# EAGLE board Proiect-TSC (EAGLE 9.7.0)
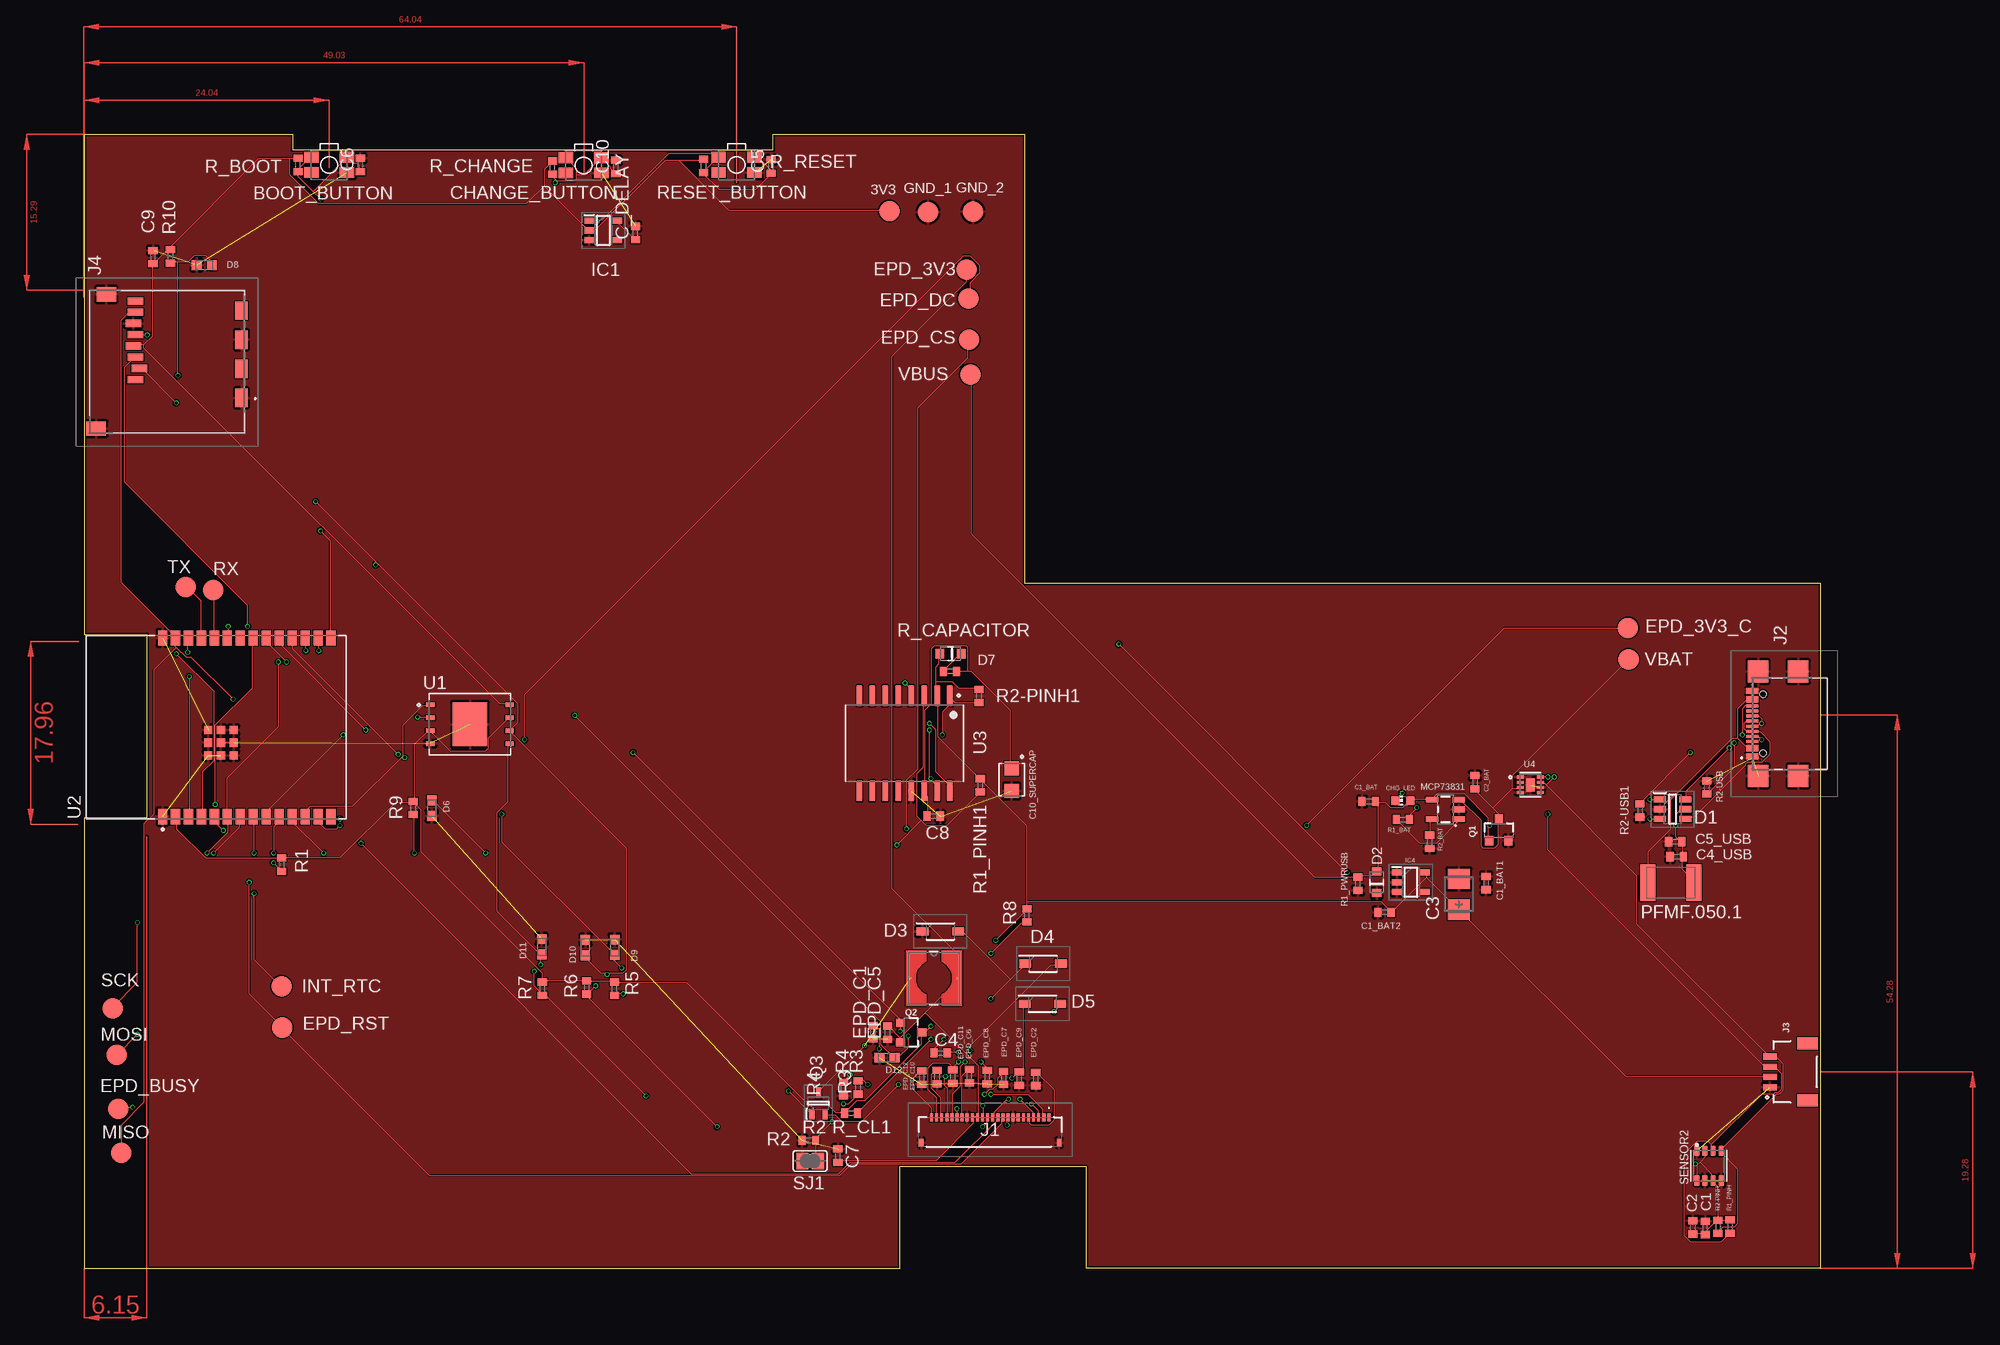
[diagram p0: board, top side]
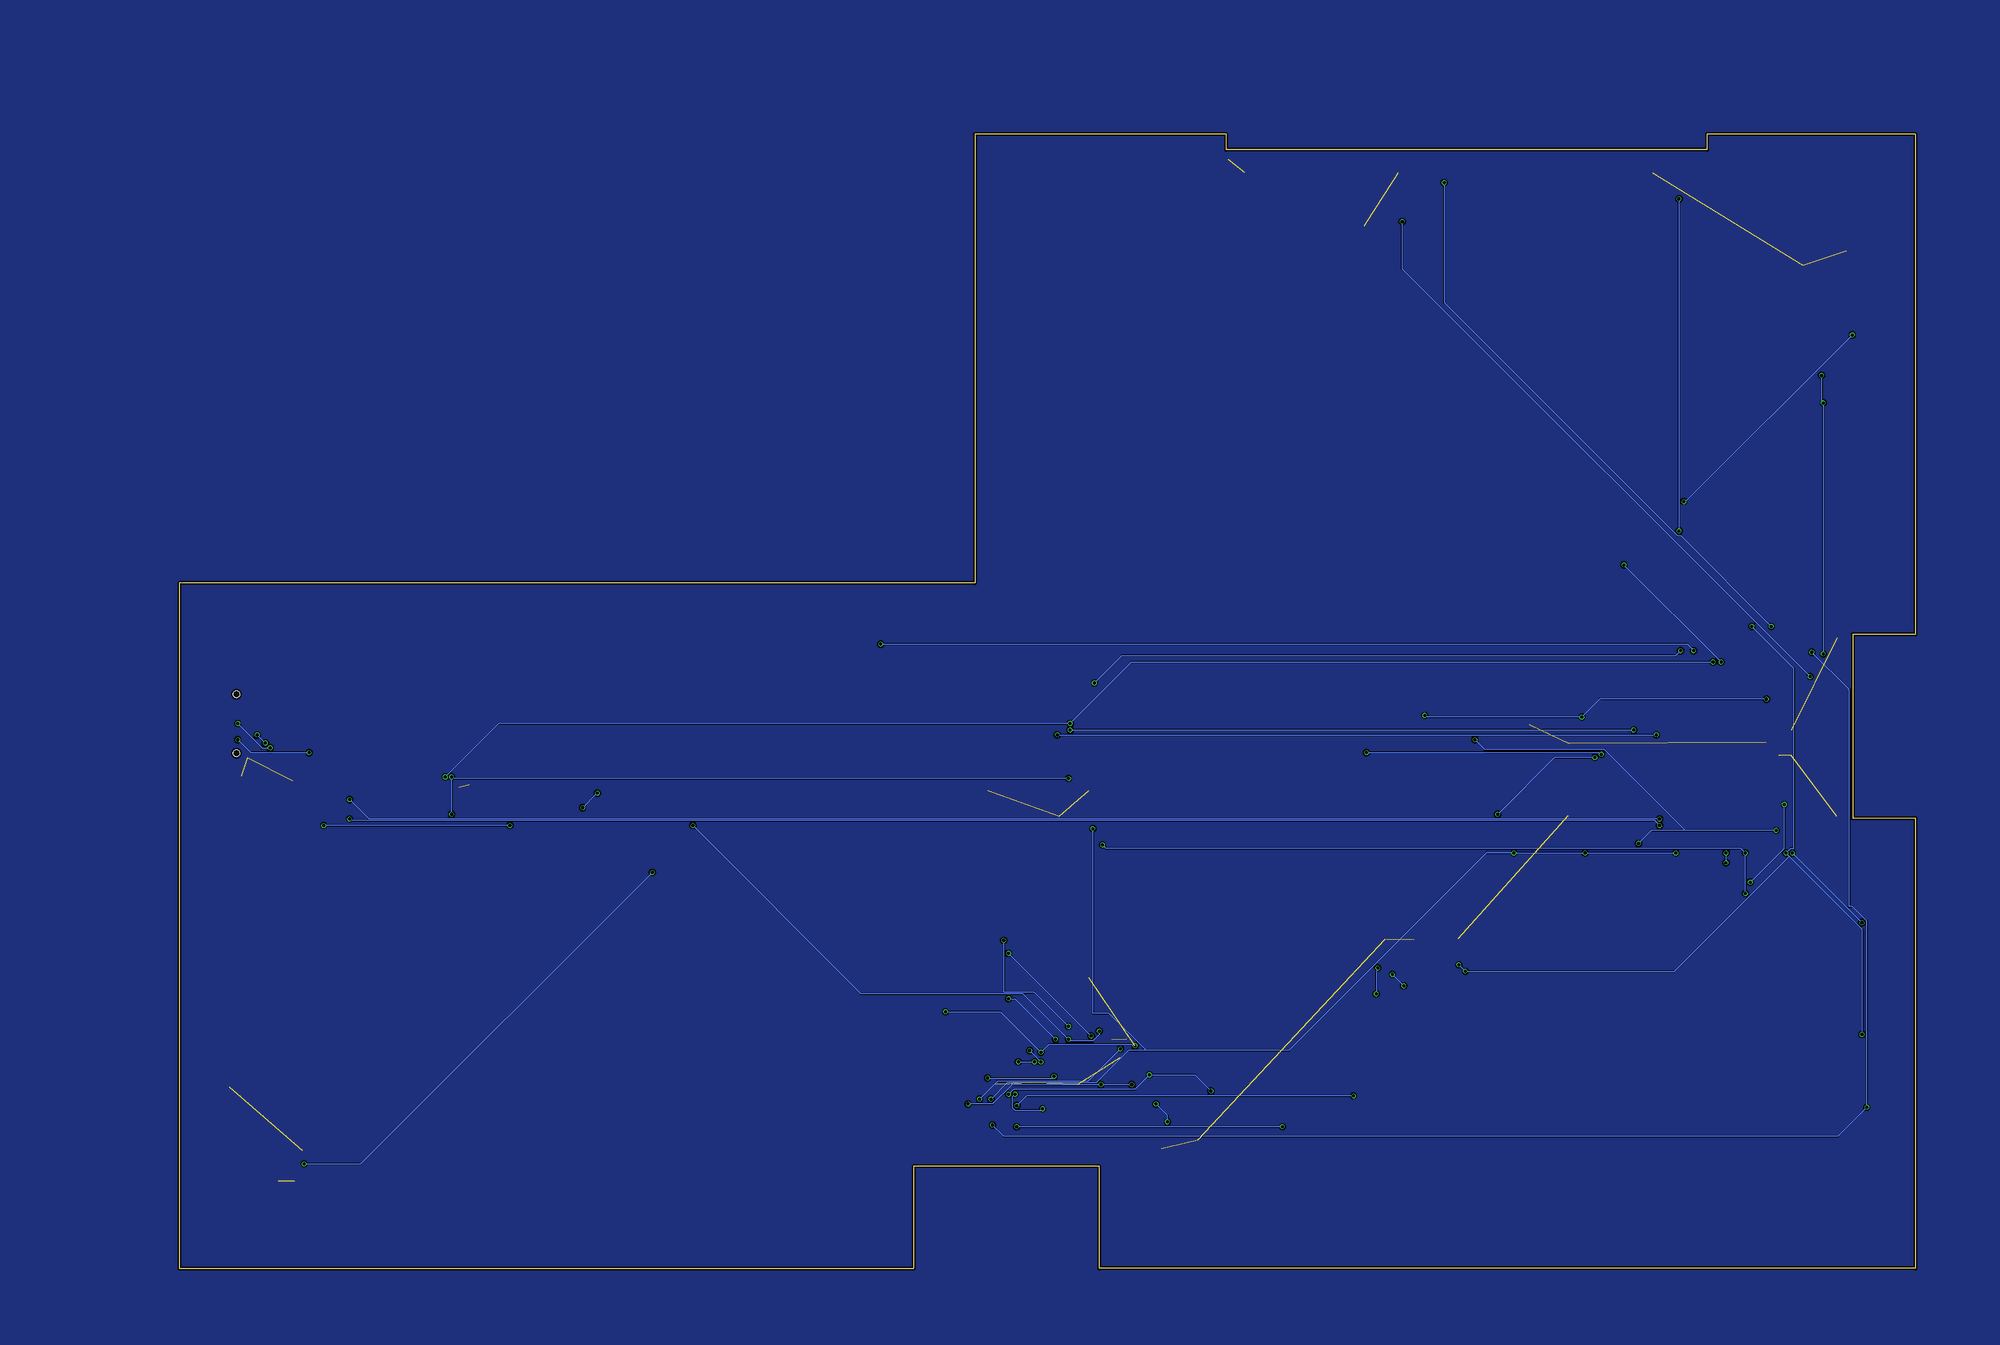
[diagram p1: board, bottom side, seen from below]

Size 170.2 x 111.2 mm. Coordinates in mm from the lower left corner, seen from the top.
Outline: 0,111.2 0,62.17 6.15,62.17 6.15,44.17 0,44.17 0,0 80,0 80,10 98.2,10 98.2,0 170.2,0 170.2,67.2 92.2,67.2 92.2,111.2 67.56,111.2 67.56,109.68 20.45,109.68 20.45,111.2 0,111.2
Copper layers (1*16): Top 0.035mm / dielectric 1.6mm / Bottom 0.035mm
Design rules "jlcpcb-2layers.dru *": minimum track width 0.003809375mm, minimum drill 0.3mm, track to track 5mil, track to pad 5mil, pad to pad 5mil, via to via 5mil, smd to smd 5mil, copper to edge 0.2mm, drill to drill 6mil, minimum pad ring 10mil, minimum via ring 3mil, stop-mask expansion 4mil, vias tented up to drill 0mil, thermal gap 10mil
Net classes: 1 net_nou: width 0.008 mm

## Footprints (pad centres in the part's own frame; a part is rotated, then mirrored left to right if it is on the bottom)
TP20R = smd 2 x 2: TP 0,0
MYBUTTON = smd 1.4 x 1.05: 1 1.75,0.75; 2 -1.75,0.75; 3 -1.75,-0.75; 4 1.75,-0.75
EAGLE-LTSPICE_C0402 = smd 0.7 x 0.9: 1 -0.65,0; 2 0.65,0
RCL_CT3528 = smd 2 x 2.2: + -1.5,0; - 1.5,0
CAPCP3225X100N = smd 1.4 x 1.4: 1 -1.1,0; 2 1.1,0
ADAFRUIT_CHIP-LED0603 = smd 0.8 x 0.8: A 0,-0.75; C 0,0.75
SOT95P280X145-6N = smd 1.2 x 0.6: 1 -1.25,0.95; 2 -1.25,0; 3 -1.25,-0.95; 4 1.25,-0.95; 5 1.25,0; 6 1.25,0.95
ESP32_WROVER_AVX---SD0805S020S1R0_AVX_SD0805S020S1R0_0 = smd 0.8 x 0.9: 1 -1.05,0; 2 1.05,0
SOD3716X135N = smd 1.15 x 0.8: 1 -1.75,0; 2 1.75,0
DIOC1608X36N = smd 0.97 x 0.94: 1 -0.75,0; 2 0.75,0
SOT95P280X125-5N = smd 0.9 x 0.6: 1 -1.4,0.95; 2 -1.4,0; 3 -1.4,-0.95; 4 1.4,-0.95; 5 1.4,0.95
SOT95P280X120-5N = smd 0.9 x 0.6: 1 -1.4,0.95; 2 -1.4,0; 3 -1.4,-0.95; 4 1.4,-0.95; 5 1.4,0.95
FH34SRJ24S05SH99 = smd 0.3 x 0.8: 1 5.75,1.45; 2 5.25,1.45; 3 4.75,1.45; 4 4.25,1.45; 5 3.75,1.45; 6 3.25,1.45; 7 2.75,1.45; 8 2.25,1.45; 9 1.75,1.45; 10 1.25,1.45; 11 0.75,1.45; 12 0.25,1.45; 13 -0.25,1.45; 14 -0.75,1.45; 15 -1.25,1.45; 16 -1.75,1.45; 17 -2.25,1.45; 18 -2.75,1.45; 19 -3.25,1.45; 20 -3.75,1.45; 21 -4.25,1.45; 22 -4.75,1.45; 23 -5.25,1.45; 24 -5.75,1.45 | smd 0.4 x 0.8: MP1 6.75,-1.05; MP2 -6.75,-1.05
SAMACSYS_PARTS_USB4110GFA = smd 0.3 x 1.15: A1 -3.35,3.678; A4 -2.55,3.678; A5 -1.25,3.678; A6 -0.25,3.678; A7 0.25,3.678; A8 1.25,3.678; A9 2.55,3.678; A12 3.35,3.678; B1 3.05,3.678; B4 2.25,3.678; B5 1.75,3.678; B6 0.75,3.678; B7 -0.75,3.678; B8 -1.75,3.678; B9 -2.25,3.678; B12 -3.05,3.678 | smd 2.18 x 2: MP1 -5.11,-0.827; MP2 5.11,-0.827; MP3 -5.11,3.103; MP4 5.11,3.103 | hole 0.65: -2.89,2.603; 2.89,2.603
JST04_1MM_RA = smd 0.6 x 1.35: 1 -1.5,0; 2 -0.5,0; 3 0.5,0; 4 1.5,0 | smd 1.2 x 2: NC1 2.8,-3.675; NC2 -2.8,-3.675
112ATAARR03ATTEND = smd 1.8 x 1.2: G1 10.6,10.4; G2 4.9,10.4; S1 7.75,10.4; S2 2.05,10.4 | smd 1.4 x 1.9: G3 13.6,-3.85; G4 0.45,-2.85 | smd 0.7 x 1.5: P1 8.8,0; P2 7.7,0.4; P3 6.6,0; P4 5.5,-0.2; P5 4.4,0; P6 3.3,-0.2; P7 2.2,0; P8 1.1,0
IND_4828-WE-TPC_WRE = smd 0.127 x 0.127: 1 -2.286,0; 2 2.286,0
ESP32_WROVER_SPARKFUN-IC-POWER_SOT23-5 = smd 0.55 x 1.2: 1 -0.95,-1.3; 2 0,-1.3; 3 0.95,-1.3; 4 0.95,1.3; 5 -0.95,1.3
ESP32C6_VARISTOR_CT/CN1812 = smd 1.5 x 3.6: 1 -2.25,0; 2 2.25,0
ESP32_WROVER_SPARKFUN-DISCRETESEMI_SOT23-3 = smd 0.8 x 0.9: 1 -0.95,-1; 2 0.95,-1; 3 0,1.1
SOT65P210X110-3N = smd 1.05 x 0.5: 1 -1.05,0.65; 2 -1.05,-0.65; 3 1.05,0
ESP32_WROVER_EAGLE-LTSPICE_R0402 = smd 0.7 x 0.9: 1 -0.65,0; 2 0.65,0
ESP32_WROVER_BME680_PSON80P300X300X100-8N = smd 1.016 x 0.5: 1 1.458,1.2; 2 1.458,0.4; 3 1.458,-0.4; 4 1.458,-1.2; 5 -1.458,-1.22; 6 -1.458,-0.4; 7 -1.458,0.4; 8 -1.458,1.2
SJ = smd 1.168 x 1.6: 1 -0.762,0; 2 0.762,0
SON127P600X800X80-9N = smd 0.94 x 0.44: 1 -3.895,1.905; 2 -3.895,0.635; 3 -3.895,-0.635; 4 -3.895,-1.905; 5 3.895,-1.905; 6 3.895,-0.635; 7 3.895,0.635; 8 3.895,1.905 | smd 3.4 x 4.3: 9 0,0
XCVR_ESP32-C6-WROOM-1-N8 = smd 1.5 x 0.9: 1 -8.75,5.26; 2 -8.75,3.99; 3 -8.75,2.72; 4 -8.75,1.45; 5 -8.75,0.18; 6 -8.75,-1.09; 7 -8.75,-2.36; 8 -8.75,-3.63; 9 -8.75,-4.9; 10 -8.75,-6.17; 11 -8.75,-7.44; 12 -8.75,-8.71; 13 -8.75,-9.98; 14 -8.75,-11.25; 15 8.75,-11.25; 16 8.75,-9.98; 17 8.75,-8.71; 18 8.75,-7.44; 19 8.75,-6.17; 20 8.75,-4.9; 21 8.75,-3.63; 22 8.75,-2.36; 23 8.75,-1.09; 24 8.75,0.18; 25 8.75,1.45; 26 8.75,2.72; 27 8.75,3.99; 28 8.75,5.26 | smd 0.8 x 0.8: 29_1 -2.755,0.79; 29_2 -1.505,0.79; 29_3 -0.255,0.79; 29_4 -2.755,-0.46; 29_5 -1.505,-0.46; 29_6 -0.255,-0.46; 29_7 -2.755,-1.71; 29_8 -1.505,-1.71; 29_9 -0.255,-1.71
SOIC127P1032X265-16N = smd 2.05 x 0.59: 1 -4.655,4.445; 2 -4.655,3.175; 3 -4.655,1.905; 4 -4.655,0.635; 5 -4.655,-0.635; 6 -4.655,-1.905; 7 -4.655,-3.175; 8 -4.655,-4.445; 9 4.655,-4.445; 10 4.655,-3.175; 11 4.655,-1.905; 12 4.655,-0.635; 13 4.655,0.635; 14 4.655,1.905; 15 4.655,3.175; 16 4.655,4.445
SON50P200X200X80-9N = smd 0.76 x 0.27: 1 -0.985,0.75; 2 -0.985,0.25; 3 -0.985,-0.25; 4 -0.985,-0.75; 5 0.985,-0.75; 6 0.985,-0.25; 7 0.985,0.25; 8 0.985,0.75 | smd 0.9 x 1.3: 9 0,0

## Placement (x,y rotation side)
3V3  TPTP20R  [TP20R]  78.95,103.68 0 top
BOOT_BUTTON  BUTTON_CUSYOMV1  [MYBUTTON]  24.04,108.2 180 top
C1  100nF  [EAGLE-LTSPICE_C0402]  157.72,4.04 90 top
C1_BAT  4.7uF  [EAGLE-LTSPICE_C0402]  125.94,45.79 180 top
C1_BAT1  4.7uF  [EAGLE-LTSPICE_C0402]  137.45,37.79 90 top
C1_BAT2  4.7uF  [EAGLE-LTSPICE_C0402]  127.49,34.92 180 top
C2  100nF  [EAGLE-LTSPICE_C0402]  158.94,3.98 90 top
C2_BAT  4.7uF  [EAGLE-LTSPICE_C0402]  136.35,47.67 90 top
C3  100uF TANT  [RCL_CT3528]  134.78,36.7 90 top
C4  4.7uF/25V  [EAGLE-LTSPICE_C0402]  83.98,21.13 0 top
C4_USB  100nF  [EAGLE-LTSPICE_C0402]  156.14,40.38 180 top
C5  1uF  [EAGLE-LTSPICE_C0402]  67.34,108.05 90 top
C5_USB  4.7uF  [EAGLE-LTSPICE_C0402]  155.99,41.86 180 top
C6  100nF  [EAGLE-LTSPICE_C0402]  27.09,108.2 90 top
C7  10uF  [EAGLE-LTSPICE_C0402]  73.9,11.07 90 top
C8  100nF  [EAGLE-LTSPICE_C0402]  83.29,44.35 0 top
C9  100nF  [EAGLE-LTSPICE_C0402]  6.76,99.16 90 top
C10  100nF  [EAGLE-LTSPICE_C0402]  52.13,108 90 top
C10_SUPERCAP  CPH3225A  [CAPCP3225X100N]  90.94,47.93 270 top
C_DELAY  100nF  [EAGLE-LTSPICE_C0402]  54.06,101.52 90 top
CHANGE_BUTTON  BUTTON_CUSYOMV1  [MYBUTTON]  48.98,108.15 180 top
CHG_LED  1  [ADAFRUIT_CHIP-LED0603]  129.29,45.87 90 top
D1  USBLC6-2SC6Y  [SOT95P280X145-6N]  155.74,45.03 0 top
D2  ESP32_WROVER_AVX---SD0805S020S1R0_AVX_SD0805S020S1R0_0_0AVX_SD0805S020S1R0_0_0  [ESP32_WROVER_AVX---SD0805S020S1R0_AVX_SD0805S020S1R0_0]  126.73,37.87 90 top
D3  MBR0530  [SOD3716X135N]  83.95,33.04 0 top
D4  MBR0530  [SOD3716X135N]  94.01,29.89 0 top
D5  MBR0530  [SOD3716X135N]  93.96,25.96 0 top
D6  PGB1010603MR  [DIOC1608X36N]  34.09,45.13 270 top
D7  ESP32_WROVER_AVX---SD0805S020S1R0_AVX_SD0805S020S1R0_0_0AVX_SD0805S020S1R0_0_0  [ESP32_WROVER_AVX---SD0805S020S1R0_AVX_SD0805S020S1R0_0]  84.95,60.27 180 top
D8  PGB1010603MR  [DIOC1608X36N]  11.79,98.37 180 top
D9  PGB1010603MR  [DIOC1608X36N]  52.03,31.49 90 top
D10  PGB1010603MR  [DIOC1608X36N]  49.16,31.47 90 top
D11  PGB1010603MR  [DIOC1608X36N]  44.86,31.54 90 top
D12  PGB1010603MR  [DIOC1608X36N]  78.72,20.67 180 top
EPD_3V3  TPTP20R  [TP20R]  86.52,97.91 0 top
EPD_3V3_C  TPTP20R  [TP20R]  151.37,62.81 0 top
EPD_BUSY  TPTP20R  [TP20R]  3.34,15.67 0 top
EPD_C1  1uF/50V  [EAGLE-LTSPICE_C0402]  77.35,23.16 90 top
EPD_C2  1uF/50V  [EAGLE-LTSPICE_C0402]  93.3,18.59 90 top
EPD_C5  0.1uF/50V  [EAGLE-LTSPICE_C0402]  78.77,23.11 90 top
EPD_C6  1uF/50V  [EAGLE-LTSPICE_C0402]  86.8,18.87 90 top
EPD_C7  1uF/50V  [EAGLE-LTSPICE_C0402]  90.15,18.69 90 top
EPD_C8  1uF/50V  [EAGLE-LTSPICE_C0402]  88.55,18.77 90 top
EPD_C9  1uF/50V  [EAGLE-LTSPICE_C0402]  91.68,18.62 90 top
EPD_C10  1uF/50V  [EAGLE-LTSPICE_C0402]  83.62,18.77 90 top
EPD_C11  1uF/50V  [EAGLE-LTSPICE_C0402]  85.17,18.82 90 top
EPD_C12  1uF/50V  [EAGLE-LTSPICE_C0402]  82.13,18.72 90 top
EPD_CS  TPTP20R  [TP20R]  86.77,91.06 0 top
EPD_DC  TPTP20R  [TP20R]  86.7,95.09 0 top
EPD_RST  TPTP20R  [TP20R]  19.44,23.62 0 top
GND_1  TPTP20R  [TP20R]  82.76,103.55 0 top
GND_2  TPTP20R  [TP20R]  87.13,103.6 0 top
IC1  BD5229G-TR  [SOT95P280X125-5N]  50.91,101.77 0 top
IC4  XC6220A331MR-G  [SOT95P280X120-5N]  130.08,37.87 0 top
INT_RTC  TPTP20R  [TP20R]  19.36,27.68 0 top
J1  FH34SRJ-24S-0.5SH_99_  [FH34SRJ24S05SH99]  88.83,13.38 0 top
J2  SAMACSYS_PARTS_USB4110-GF-A  [SAMACSYS_PARTS_USB4110GFA]  167.22,53.41 90 top
J3  QWIIC_RIGHT_ANGLE  [JST04_1MM_RA]  165.29,19.28 90 top
J4  112A-TAAR-R03_ATTEND  [112ATAARR03ATTEND]  5.04,95.96 270 top
L1  68uH  [IND_4828-WE-TPC_WRE]  83.32,28.47 0 top
MCP73831  ESP32_WROVER_SPARKFUN-IC-POWER_MCP73831  [ESP32_WROVER_SPARKFUN-IC-POWER_SOT23-5]  133.46,45.01 90 top
MISO  TPTP20R  [TP20R]  3.64,11.35 0 top
MOSI  TPTP20R  [TP20R]  3.21,20.93 0 top
PFMF.050.1  ESP32C6_VARISTORCN1812  [ESP32C6_VARISTOR_CT/CN1812]  155.56,37.82 0 top
Q1  20V/4.2A/52mΩ/1.4W  [ESP32_WROVER_SPARKFUN-DISCRETESEMI_SOT23-3]  138.69,42.95 0 top
Q2  20V/4.2A/52mΩ/1.4W  [ESP32_WROVER_SPARKFUN-DISCRETESEMI_SOT23-3]  81.06,23.14 270 top
Q3  SI1308EDL-T1-GE3  [SOT65P210X110-3N]  71.99,16.2 90 top
R1  10K  [ESP32_WROVER_EAGLE-LTSPICE_R0402]  19.39,39.6 90 top
R1_BAT  200  [ESP32_WROVER_EAGLE-LTSPICE_R0402]  129.29,44.02 180 top
R1_PINH  10K  [ESP32_WROVER_EAGLE-LTSPICE_R0402]  161.37,4.11 90 top
R1_PINH1  10K  [ESP32_WROVER_EAGLE-LTSPICE_R0402]  87.87,47.37 90 top
R1_PWRUSB  100K  [ESP32_WROVER_EAGLE-LTSPICE_R0402]  124.87,37.72 90 top
R2  2.2  [ESP32_WROVER_EAGLE-LTSPICE_R0402]  71.05,12.57 0 top
R2-PINH  10K  [ESP32_WROVER_EAGLE-LTSPICE_R0402]  160.18,4.09 90 top
R2-PINH1  10K  [ESP32_WROVER_EAGLE-LTSPICE_R0402]  87.74,56.13 90 top
R2-USB  5k1  [ESP32_WROVER_EAGLE-LTSPICE_R0402]  159.09,47.16 90 top
R2-USB1  5k1  [ESP32_WROVER_EAGLE-LTSPICE_R0402]  152.53,44.9 90 top
R2_BAT  2K  [ESP32_WROVER_EAGLE-LTSPICE_R0402]  131.91,41.83 90 top
R3  0.47  [ESP32_WROVER_EAGLE-LTSPICE_R0402]  75.88,17.75 90 top
R4  10K  [ESP32_WROVER_EAGLE-LTSPICE_R0402]  74.45,17.6 90 top
R5  10K  [ESP32_WROVER_EAGLE-LTSPICE_R0402]  52,27.43 90 top
R6  10K  [ESP32_WROVER_EAGLE-LTSPICE_R0402]  49.28,27.56 90 top
R7  10K  [ESP32_WROVER_EAGLE-LTSPICE_R0402]  44.94,27.43 90 top
R8  10K  [ESP32_WROVER_EAGLE-LTSPICE_R0402]  92.44,34.62 90 top
R9  10K  [ESP32_WROVER_EAGLE-LTSPICE_R0402]  32.27,45.16 90 top
R10  10K  [ESP32_WROVER_EAGLE-LTSPICE_R0402]  8.47,99.23 90 top
R_BOOT  10K  [ESP32_WROVER_EAGLE-LTSPICE_R0402]  20.98,108.2 90 top
R_CAPACITOR  15  [ESP32_WROVER_EAGLE-LTSPICE_R0402]  84.89,58.54 0 top
R_CHANGE  10K  [ESP32_WROVER_EAGLE-LTSPICE_R0402]  45.93,107.95 90 top
R_CL1  10K  [ESP32_WROVER_EAGLE-LTSPICE_R0402]  75.19,15.24 180 top
R_RESET  10K  [ESP32_WROVER_EAGLE-LTSPICE_R0402]  60.74,108.1 90 top
RESET_BUTTON  BUTTON_CUSYOMV1  [MYBUTTON]  63.96,108.2 180 top
RX  TPTP20R  [TP20R]  12.66,66.52 0 top
SCK  TPTP20R  [TP20R]  2.8,25.52 0 top
SENSOR2  ESP32_WROVER_BME680_BME680  [ESP32_WROVER_BME680_PSON80P300X300X100-8N]  159.29,10.08 90 top
SJ1  1  [SJ]  71.18,10.54 0 top
TX  TPTP20R  [TP20R]  9.99,66.8 0 top
U1  W25Q512JVEIQ  [SON127P600X800X80-9N]  37.83,53.36 0 top
U2  ESP32-C6-WROOM-1-N8  [XCVR_ESP32-C6-WROOM-1-N8]  12.96,53.06 90 top
U3  DS3231SN#  [SOIC127P1032X265-16N]  80.45,51.48 270 top
U4  MAX17048G+T10  [SON50P200X200X80-9N]  141.79,47.42 0 top
VBAT  TPTP20R  [TP20R]  151.42,59.71 0 top
VBUS  TPTP20R  [TP20R]  86.9,87.65 0 top

## Library data of the parts
3V3 BOOT_BUTTON CHANGE_BUTTON CHG_LED EPD_3V3 EPD_3V3_C EPD_BUSY EPD_CS EPD_DC EPD_RST GND_1 GND_2 INT_RTC MISO MOSI PFMF.050.1 RESET_BUTTON RX SCK SJ1 TX VBAT VBUS = DeskAssistant v19 v1
C1 C1_BAT C1_BAT1 C1_BAT2 C2 C2_BAT C4 C4_USB C5 C5_USB C6-C10 C_DELAY EPD_C1 EPD_C2 EPD_C5-EPD_C12 = DeskAssistant v19 v1; SPICEMODEL: NONE; SPICEPREFIX: C
C3 = DeskAssistant v19 v1; SPICEPREFIX: C
C10_SUPERCAP = DeskAssistant v19 v1; AVAILABILITY: Not in stock; CHECK_PRICES: https://www.snapeda.com/parts/CPH3225A/Seiko+Instruments/view-part/?ref=eda; DESCRIPTION: 11 mF (EDLC) Supercapacitor 3.3 V 1210 (3225 Metric) - -; MF: Seiko Instruments; MP: CPH3225A; PACKAGE: 1210 Seiko; PRICE: None; PURCHASE-URL: https://www.snapeda.com/api/url_track_click_mouser/?unipart_id=562593&manufacturer=Seiko Instruments&part_name=CPH3225A&search_term=None; SNAPEDA_LINK: https://www.snapeda.com/parts/CPH3225A/Seiko+Instruments/view-part/?ref=snap
D1 = DeskAssistant v19 v1; AVAILABILITY: In Stock; CHECK_PRICES: https://www.snapeda.com/parts/USBLC6-2SC6Y/STMicroelectronics/view-part/?ref=eda; DESCRIPTION: 17V Clamp 5A (8/20µs) Ipp Tvs Diode Surface Mount SOT-23-6; MF: STMicroelectronics; MP: USBLC6-2SC6Y; PACKAGE: SOT-23-6 STMicroelectronics; PRICE: None; SNAPEDA_LINK: https://www.snapeda.com/parts/USBLC6-2SC6Y/STMicroelectronics/view-part/?ref=snap
D2 D7 = DeskAssistant v19 v1; CENTROID_NOT_SPECIFIED: No; DATASHEET: http://datasheets.avx.com/schottky.pdf; DIGIKEY_DESCRIPTION: DIODE SCHOTTKY 20V 1A 0805; DIGIKEY_PART_NUMBER: 478-7800-1-ND; LEAD_FREE: yes; MF: AVX; MOUSER_PART_NUMBER: 581-SD0805S020S1R0; PACKAGE: 0805 (2012 metric); PREFIX: D; ROHS: yes; TEMPERATURE_RANGE_HIGH: +125°C; TEMPERATURE_RANGE_LOW: -55°C
D3-D5 = DeskAssistant v19 v1; AVAILABILITY: In Stock; CHECK_PRICES: https://www.snapeda.com/parts/MBR0530/Onsemi/view-part/?ref=eda; DESCRIPTION: Diode Schottky 30 V 500mA Surface Mount SOD-123; MF: ON Semiconductor; MP: MBR0530; PACKAGE: SOD-123-2 ON Semiconductor; PRICE: None; PURCHASE-URL: https://www.snapeda.com/api/url_track_click_mouser/?unipart_id=179458&manufacturer=ON Semiconductor&part_name=MBR0530&search_term=None; SNAPEDA_LINK: https://www.snapeda.com/parts/MBR0530/Onsemi/view-part/?ref=snap
D6 D8-D12 = DeskAssistant v19 v1; AVAILABILITY: In Stock; CHECK_PRICES: https://www.snapeda.com/parts/PGB1010603MR/Littelfuse/view-part/?ref=eda; DESCRIPTION: 150V (Typ) Clamp - Ipp Tvs Diode Surface Mount 0603 (1608 Metric); MF: Littelfuse Inc.; MP: PGB1010603MR; PACKAGE: 0603 Littelfuse Inc.; PRICE: None; PURCHASE-URL: https://www.snapeda.com/api/url_track_click_mouser/?unipart_id=5659453&manufacturer=Littelfuse Inc.&part_name=PGB1010603MR&search_term=None; SNAPEDA_LINK: https://www.snapeda.com/parts/PGB1010603MR/Littelfuse/view-part/?ref=snap
IC1 = DeskAssistant v19 v1; DESCRIPTION: Voltage Detector with Adjustable Delay Time: CMOS processes are utilized to develop high precision, low current consumption CMOS reset ICs that allow arbitrary setting of the delay time. The extensive lineup includes both Nch Open Drain and CMOS output types in a wide range of detection voltages (from 2.3V to 6.0V, in 0.1V steps), enabling selection of the ideal solution based on customer requirements. In addition, the entire series is of course both lead-free and RoHS-compliant.; HEIGHT: 1.25mm; MANUFACTURER_NAME: ROHM Semiconductor; MANUFACTURER_PART_NUMBER: BD5229G-TR; MOUSER_PART_NUMBER: 755-BD5229G-TR; MOUSER_PRICE-STOCK: https://www.mouser.co.uk/ProductDetail/ROHM-Semiconductor/BD5229G-TR?qs=4kLU8WoGk0vvnhrrYwdszw%3D%3D
IC4 = DeskAssistant v19 v1; DESCRIPTION: LDO Voltage Regulators; HEIGHT: 1.2mm; MANUFACTURER_NAME: Torex; MANUFACTURER_PART_NUMBER: XC6220A331MR-G; MOUSER_PART_NUMBER: 865-XC6220A331MR-G; MOUSER_PRICE-STOCK: https://www.mouser.co.uk/ProductDetail/Torex-Semiconductor/XC6220A331MR-G?qs=AsjdqWjXhJ8ZSWznL1J0gg%3D%3D
J1 = DeskAssistant v19 v1; DESCRIPTION: 24 Position FFC, FPC Connector Contacts, Top and Bottom 0.020" (0.50mm) Surface Mount, Right Angle; HEIGHT: 1.1mm; MANUFACTURER_NAME: Hirose; MANUFACTURER_PART_NUMBER: FH34SRJ-24S-0.5SH(99); MOUSER_PART_NUMBER: 798-FH34SRJ24S05SH99; MOUSER_PRICE-STOCK: https://www.mouser.co.uk/ProductDetail/Hirose-Connector/FH34SRJ-24S-0.5SH99?qs=vcbW%252B4%252BSTIpKBl5ap9J8Fw%3D%3D
J2 = DeskAssistant v19 v1; DESCRIPTION: CONN USB 2.0 TYPE-C R/A SMT; HEIGHT: 3.26mm; MANUFACTURER_NAME: GCT (GLOBAL CONNECTOR TECHNOLOGY); MANUFACTURER_PART_NUMBER: USB4110-GF-A; MOUSER_PART_NUMBER: 640-USB4110-GF-A; MOUSER_PRICE-STOCK: https://www.mouser.co.uk/ProductDetail/GCT/USB4110-GF-A?qs=KUoIvG%2F9IlYiZvIXQjyJeA%3D%3D
J3 = DeskAssistant v19 v1; PROD_ID: CONN-13694
J4 = DeskAssistant v19 v1; DESCRIPTION: Micro SD Card Socket, Push-Push Type, Top Mount, SMT, H=1.83mm, 10u; HEIGHT: 1.9mm; MANUFACTURER_NAME: ATTEND; MANUFACTURER_PART_NUMBER: 112A-TAAR-R03 ATTEND
L1 = DeskAssistant v19 v1; COPYRIGHT: Copyright (C) 2024 Ultra Librarian. All rights reserved.; MANUFACTURER_PART_NUMBER: 744043680; MFR_NAME: Wurth Electronics
MCP73831 = DeskAssistant v19 v1; PROD_ID: IC-09995
Q1 Q2 = DeskAssistant v19 v1; PROD_ID: TRAN-14388
Q3 = DeskAssistant v19 v1; AVAILABILITY: In Stock; CHECK_PRICES: https://www.snapeda.com/parts/SI1308EDL-T1-GE3/Vishay+Siliconix/view-part/?ref=eda; DESCRIPTION: Si1308EDL-T1-GE3 N-channel MOSFET Transistor, 1.5 A, 30 V, 3-Pin SC-70 | Siliconix / Vishay SI1308EDL-T1-GE3; MF: Vishay Siliconix; MP: SI1308EDL-T1-GE3; PACKAGE: SOT-323 Vishay Semiconductor; PRICE: None; PURCHASE-URL: https://www.snapeda.com/api/url_track_click_mouser/?unipart_id=274603&manufacturer=Vishay Siliconix&part_name=SI1308EDL-T1-GE3&search_term=None; SNAPEDA_LINK: https://www.snapeda.com/parts/SI1308EDL-T1-GE3/Vishay+Siliconix/view-part/?ref=snap
R1 R1_BAT R1_PINH R1_PINH1 R1_PWRUSB R2 R2-PINH R2-PINH1 R2-USB R2-USB1 R2_BAT R3-R10 R_BOOT R_CAPACITOR R_CHANGE R_CL1 R_RESET = DeskAssistant v19 v1; SPICEMODEL: NONE; SPICEPREFIX: R
SENSOR2 = DeskAssistant v19 v1; AVAILABILITY: Unavailable; DESCRIPTION: Integrated Environmental Unit; MF: Bosch Sensortec; MP: BME680; PACKAGE: LGA-8 Bosch Tools; PRICE: None
U1 = DeskAssistant v19 v1; AVAILABILITY: In Stock; CHECK_PRICES: https://www.snapeda.com/parts/W25Q512JVEIQ/Winbond+Electronics/view-part/?ref=eda; DESCRIPTION: FLASH - NOR Memory IC 512Mb (64M x 8) SPI - Quad I/O 133 MHz 8-WSON (8x6); MF: Winbond Electronics; MP: W25Q512JVEIQ; PACKAGE: Package; PRICE: None; SNAPEDA_LINK: https://www.snapeda.com/parts/W25Q512JVEIQ/Winbond+Electronics/view-part/?ref=snap
U2 = DeskAssistant v19 v1; AVAILABILITY: In Stock; CHECK_PRICES: https://www.snapeda.com/parts/ESP32-C6-WROOM-1-N8/Espressif+Systems/view-part/?ref=eda; DESCRIPTION: Multiprotocol Modules ESP32-C6 module, Wi-Fi 6 in 2.4 GHz band, Bluetooth 5, Zigbee 3.0 and Thread. ESP34-WROOM Compatible - ENGINEERING SAMPLE; MF: Espressif Systems; MP: ESP32-C6-WROOM-1-N8; PACKAGE: None; PRICE: None; SNAPEDA_LINK: https://www.snapeda.com/parts/ESP32-C6-WROOM-1-N8/Espressif+Systems/view-part/?ref=snap
U3 = DeskAssistant v19 v1; AVAILABILITY: In Stock; CHECK_PRICES: https://www.snapeda.com/parts/DS3231SN%23/Analog+Devices/view-part/?ref=eda; DESCRIPTION: Extremely Accurate I²C-Integrated RTC/TCXO/Crystal; MF: Analog Devices; MP: DS3231SN#; PACKAGE: SOIC-16 Maxim; PRICE: None; PURCHASE-URL: https://www.snapeda.com/api/url_track_click_mouser/?unipart_id=99048&manufacturer=Analog Devices&part_name=DS3231SN#&search_term=None; SNAPEDA_LINK: https://www.snapeda.com/parts/DS3231SN%23/Analog+Devices/view-part/?ref=snap
U4 = DeskAssistant v19 v1; AVAILABILITY: In Stock; CHECK_PRICES: https://www.snapeda.com/parts/MAX17048G+T10/Analog+Devices/view-part/?ref=eda; DESCRIPTION: 3µA 1-Cell/2-Cell Fuel Gauge with ModelGauge; MF: Analog Devices; MP: MAX17048G+T10; PACKAGE: TDFN-8 Maxim; PRICE: None; PURCHASE-URL: https://www.snapeda.com/api/url_track_click_mouser/?unipart_id=329239&manufacturer=Analog Devices&part_name=MAX17048G+T10&search_term=None; SNAPEDA_LINK: https://www.snapeda.com/parts/MAX17048G+T10/Analog+Devices/view-part/?ref=snap

## Nets
3V3 [net_nou]: 3V3.TP C1_BAT2.1 C3.+ C9.1 D7.2 IC1.2 IC4.5 J3.2 J4.P4 Q2.3 R1.2 R1_PINH1.2 R2-PINH1.2 R5.2 R6.2 R7.2 R8.2 R9.2 R10.2 R_BOOT.2 R_CHANGE.2 R_CL1.2 R_RESET.2 U1.3 U1.7 U1.8 U2.2 U3.2
32KHZ: R2-PINH1.1 U2.9 U3.1
DN: D1.4 J2.A7 J2.B7
DP: D1.6 J2.A6 J2.B6
EPD_3V3 [net_nou]: C7.1 EPD_3V3.TP EPD_C5.2 J1.15 J1.16 L1.2 Q2.2
EPD_3V3_C [net_nou]: EPD_3V3_C.TP Q2.1 R_CL1.1 U2.18
EPD_BUSY: EPD_BUSY.TP J1.9 U2.26
EPD_CS: D6.1 EPD_CS.TP J1.12 R9.1 U2.11
EPD_DC: EPD_DC.TP J1.11 U2.5
EPD_RST: EPD_RST.TP J1.10 U2.21
FLASH_CS: D9.1 R5.1 U1.1 U2.12
GDR: J1.2 Q3.1 R4.2
GND: BOOT_BUTTON.2 C1.2 C1_BAT1.1 C1_BAT1.2 C1_BAT2.2 C1_BAT.2 C2.2 C2_BAT.2 C3.- C4_USB.2 C5.2 C5_USB.2 C6.2 C7.2 C8.2 C9.2 C10.2 C10_SUPERCAP.2 C_DELAY.2 CHANGE_BUTTON.2 D1.2 D2.1 D3.1 D6.2 D8.2 D9.2 D10.2 D11.2 D12.2 EPD_C1.1 EPD_C2.1 EPD_C5.1 EPD_C6.1 EPD_C7.1 EPD_C8.1 EPD_C9.1 EPD_C10.1 EPD_C11.1 EPD_C12.1 GND_1.TP GND_2.TP IC1.3 IC4.1 IC4.2 IC4.3 J1.8 J1.17 J1.MP1 J1.MP2 J2.A1 J2.A12 J2.B1 J2.B12 J2.MP1 J2.MP2 J2.MP3 J2.MP4 J3.1 J4.G1 J4.G2 J4.G3 J4.G4 J4.P6 MCP73831.2 Q1.2 R1_PWRUSB.1 R2-USB1.1 R2-USB.2 R2.1 R2_BAT.1 R4.1 RESET_BUTTON.2 SENSOR2.1 SENSOR2.5 SENSOR2.7 SJ1.1 U1.4 U1.9 U2.1 U2.28 U2.29_1 U2.29_2 U2.29_3 U2.29_4 U2.29_5 U2.29_6 U2.29_7 U2.29_8 U2.29_9 U3.13 U4.1 U4.4 U4.6 U4.9
GPIO8: R1.1 U2.10
I2C_PW: C1.1 C2.1 R1_PINH.2 R2-PINH.2 SENSOR2.2 SENSOR2.6 SENSOR2.8 U2.17
INT_RTC: INT_RTC.TP R1_PINH1.1 U2.8 U3.3
IO/BOOT: BOOT_BUTTON.3 BOOT_BUTTON.4 C6.1 R_BOOT.1 U2.15
IO/CHANGE: C10.1 CHANGE_BUTTON.3 CHANGE_BUTTON.4 R_CHANGE.1 U2.23
MISO: D12.1 J4.P7 MISO.TP R8.1 U1.2 U2.27
MOSI: D11.1 J1.14 J4.P3 MOSI.TP R7.1 U1.5 U2.7
N$1: J2.A5 R2-USB1.2
N$3: C_DELAY.1 IC1.5
N$5: CHG_LED.C R1_BAT.1
N$6: C4.1 D3.2 D4.1
N$7: MCP73831.1 R1_BAT.2
N$8: D7.1 R_CAPACITOR.1
N$9: MCP73831.5 R2_BAT.2
N$10: J2.B5 R2-USB.1
N$11: EPD_C12.2 J1.24
N$21: EPD_C1.2 J1.4
N$22: EPD_C2.2 J1.5
N$23: EPD_C6.2 J1.18
N$24: EPD_C7.2 J1.19
N$25: EPD_C8.2 J1.20
N$27: EPD_C10.2 J1.22
PREVGH: D5.1 EPD_C9.2 J1.21
PREVGL: D4.2 EPD_C11.2 J1.23
RESE: J1.3 Q3.2 R3.2
RESE': R2.2 R3.1 SJ1.2
RESET: C5.1 IC1.1 R_RESET.1 RESET_BUTTON.3 RESET_BUTTON.4 U2.3
RTC_RST: U2.16 U3.4
RX: RX.TP U2.24
SCK: D10.1 J1.13 J4.P5 R6.1 SCK.TP U1.6 U2.6
SCL: J3.4 R2-PINH.1 SENSOR2.4 U2.20 U3.16 U4.7
SDA: J3.3 R1_PINH.1 SENSOR2.3 U2.19 U3.15 U4.8
SRC: C4.2 D5.2 L1.1 Q3.3
SS_SD: D8.1 J4.P2 R10.1 U2.4
TX: TX.TP U2.25
USB_D+: D1.1 U2.14
USB_D-: D1.3 U2.13
VBAT [net_nou]: C2_BAT.1 MCP73831.3 Q1.3 U4.2 U4.3 VBAT.TP
VBUS [net_nou]: C1_BAT.1 C4_USB.1 C5_USB.1 CHG_LED.A D1.5 D2.2 MCP73831.4 PFMF.050.1.2 Q1.1 R1_PWRUSB.2 VBUS.TP
VRTC [net_nou]: C8.1 C10_SUPERCAP.1 R_CAPACITOR.2 U3.14
VUSB [net_nou]: J2.A4 J2.A9 J2.B4 J2.B9 PFMF.050.1.1

## Tracks (layer width: path | path; a pad name or v marks a point on that pad's centre or on a via)
3V3  (via drill 0.3)
  Top 0.008: 8.1,99.79 6.83,98.52 C9.1 6.67,98.36 6.67,91.37 5.88,90.58 | 8.1,99.79 8.41,99.79 R10.2 8.1,99.79 | 20.16,108.84 17.15,108.84 8.1,99.79 | 20.16,108.84 20.96,108.84 R_BOOT.2 | 5.88,90.58 4.92,90.58 J4.P4 | 45.09,106.14 49.37,101.85 IC1.2 49.53,101.69 50.01,101.69 56.99,108.68 58.26,108.68 | 45.09,106.14 45.09,107.73 45.88,108.52 R_CHANGE.2 | 58.26,108.68 60.64,108.68 R_RESET.2 | 58.26,108.68 63.18,103.76 78.9,103.76 3V3.TP | 20.16,108.84 20.16,107.25 23.02,104.39 43.34,104.39 45.09,106.14 | 131.6,38.35 128.27,35.02 C1_BAT2.1 128.11,35.02 127.16,35.97 92.39,35.97 | 131.6,38.35 131.6,38.67 IC4.5 | 134.78,35.18 151.13,18.83 165.26,18.83 J3.2 | 134.78,35.18 131.6,38.35 | 134.78,35.18 C3.+ | 92.39,35.97 92.39,43.43 87.95,47.88 R1_PINH1.2 87.79,48.04 83.66,52.16 83.66,56.13 U3.2 83.5,56.29 83.5,57.56 | 92.39,35.97 92.39,35.34 R8.2 92.39,35.18 v89.38,32.16 | 83.5,57.56 83.5,58.99 83.82,59.31 83.82,60.26 D7.2 | 83.5,57.56 85.09,57.56 85.73,56.93 87.63,56.93 R2-PINH1.2 | 82.08,22.79 82.08,23.11 Q2.3 82.08,22.79 | 82.08,22.79 82.08,22 76.52,16.44 75.72,16.44 74.61,15.33 R_CL1.2 74.45,15.33 73.66,15.33 72.55,16.44 70.64,16.44 59.06,28.03 52.07,28.03 R5.2 51.91,28.19 49.37,28.19 R6.2 49.21,28.19 45.09,28.19 R7.2 44.93,28.19 44.93,28.99 33.02,40.89 33.02,45.02 32.39,45.65 R9.2 | U2.2 9.05,44.23 9.05,43.11 11.91,40.26 19.37,40.26 R1.2 19.53,40.26 25.08,40.26 30.48,45.65 32.23,45.65 R9.2 | R9.2 32.39,45.81 32.39,51.37 33.81,52.8 U1.3 33.97,52.64 35.88,50.73 39.37,50.73 39.69,51.05 39.69,52 41.59,53.91 U1.7 41.75,54.07 41.75,55.18 U1.8 41.59,55.34 40.8,55.34 5.88,90.26 5.88,90.58
  Top 0.008: 82.08,22.79 v83.03,23.75
  Bottom 0.008: v89.38,32.16 89.38,27.08 86.36,27.08 v83.03,23.75
32KHZ  (via drill 0.3)
  Top 0.004: 85.25,55.66 84.77,56.13 U3.1 | 85.25,55.66 85.41,55.5 87.63,55.5 R2-PINH1.1 | v25.4,52.32 17.94,44.86 17.94,44.38 U2.9 | v84.14,52.32 84.14,54.54 85.25,55.66
  Bottom 0.004: v84.14,52.32 v25.4,52.32
DN
  Top 0.004: J2.A7 163.51,53.59 162.88,53.59 162.72,53.43 162.72,52.96 162.88,52.8 163.51,52.8 J2.B7 163.67,52.64 164.31,52.64 165.26,51.69 165.26,50.42 164.47,49.62 163.04,49.62 162.88,49.46 162.88,49.31 157.8,44.23 157,44.23 D1.4
DP  (via drill 0.3)
  Top 0.004: J2.A6 163.67,53.27 164.31,53.27 v164.47,53.43 164.47,53.91 164.15,54.23 163.67,54.23 J2.B6 | v161.29,51.05 157,46.77 157,46.13 D1.6
  Bottom 0.004: v161.29,51.05 162.09,51.05 v164.47,53.43
EPD_3V3
  Top 0.008: C7.1 73.98,10.57 83.5,10.57 87.16,14.22 87.16,14.7 J1.16 87.16,14.86 87.47,14.86 J1.15 87.63,14.86 87.63,19.94 82.55,25.02 82.39,25.02 | 80.01,22.64 78.9,23.75 EPD_C5.2 | 80.01,22.64 80.01,22.32 Q2.2 | 82.39,25.02 85.57,28.19 85.57,28.51 | 82.39,25.02 80.01,22.64 | EPD_3V3.TP 86.52,96.77 79.22,89.47 79.22,37.24 85.57,30.89 85.57,28.51 | 85.57,28.51 L1.2
EPD_3V3_C  (via drill 0.3)
  Top 0.008: v83.03,22.48 75.88,15.33 R_CL1.1 | v80.01,23.27 80.01,24.06 Q2.1 80.17,24.22 v53.82,50.58 | v30.8,50.42 20.48,60.74 20.48,61.69 U2.18 | v119.86,43.43 139.22,62.8 151.29,62.8 EPD_3V3_C.TP
  Bottom 0.008: v80.01,23.27 80.01,22.95 80.65,22.32 82.87,22.32 v83.03,22.48 87.47,26.92 103.35,26.92 v119.86,43.43 | v30.8,50.42 30.96,50.58 v53.82,50.58
EPD_BUSY  (via drill 0.3)
  Top 0.004: v90.49,14.06 90.49,14.7 J1.9 | v4.76,15.81 3.34,15.81 EPD_BUSY.TP | v10.16,60.42 10.16,61.69 U2.26
  Bottom 0.004: v90.49,14.06 89.38,12.95 7.62,12.95 v4.76,15.81 4.76,34.07 6.19,35.49 6.51,35.49 6.51,56.77 v10.16,60.42
EPD_CS  (via drill 0.3)
  Top 0.004: v90.65,16.6 90.49,16.6 89.22,15.33 89.22,14.86 J1.12 | v39.37,40.73 34.13,45.97 D6.1 | v32.39,40.73 32.39,44.38 R9.1 | v23.5,40.73 20.48,43.75 20.48,44.23 U2.11 | v80.65,43.11 80.65,47.88 81.76,48.99 81.76,84.39 86.68,89.31 86.68,91.06 EPD_CS.TP
  Bottom 0.004: v90.65,16.6 89.06,18.19 80.33,18.19 77.15,21.37 75.41,21.37 | 75.41,21.37 61.44,21.37 42.07,40.73 v39.37,40.73 v32.39,40.73 v23.5,40.73 | v80.65,43.11 80.65,25.02 79.06,25.02 75.41,21.37
EPD_DC  (via drill 0.3)
  Top 0.004: v27.15,41.69 59.53,9.3 73.98,9.3 75.09,10.41 85.41,10.41 89.54,14.54 89.54,14.7 J1.11 | v13.65,42.96 12.86,43.75 12.86,44.23 U2.5 | v43.18,51.85 43.18,56.29 86.2,99.31 86.84,99.31 87.79,98.36 87.79,97.57 86.84,96.61 86.84,95.18 EPD_DC.TP
  Bottom 0.004: v27.15,41.69 25.88,42.96 22.54,42.96 | v13.65,42.96 22.54,42.96 | v43.18,51.85 42.23,50.89 30.48,50.89 22.54,42.96
EPD_RST  (via drill 0.3)
  Top 0.004: J1.10 90.01,14.7 90.01,14.22 86.04,10.25 75.25,10.25 74.14,9.14 33.81,9.14 19.37,23.59 EPD_RST.TP 19.37,23.75 16.19,26.92 v16.19,37.88 | v12.86,45.5 12.86,53.27 16.51,56.93 16.51,61.69 U2.21
  Bottom 0.004: v12.86,45.5 12.86,41.21 v16.19,37.88
FLASH_CS  (via drill 0.3)
  Top 0.004: v52.87,26.92 52.07,26.92 R5.1 | v52.71,29.46 51.91,30.26 51.91,30.73 D9.1 51.91,30.89 40.96,41.84 v40.96,44.54 | 31.27,50.26 31.27,53.27 33.18,55.18 33.81,55.18 U1.1 | 31.27,50.26 26.35,45.34 22.23,45.34 21.75,44.86 21.75,44.38 U2.12 | 31.27,50.26 v31.43,50.1
  Bottom 0.004: v52.87,26.92 52.87,29.46 v52.71,29.46 | v40.96,44.54 35.4,50.1 v31.43,50.1
GDR  (via drill 0.3)
  Top 0.004: v88.9,17.08 92.55,17.08 93.98,15.65 93.98,14.86 J1.2 | v75.09,18.98 74.45,18.35 R4.2 | v69.06,17.4 71.28,15.17 Q3.1
  Bottom 0.004: v88.9,17.08 88.42,17.56 76.52,17.56 v75.09,18.98 70.64,18.98 v69.06,17.4
GND  (27 unrouted)
  Top 0.004: U2.29_5 13.5,51.53 14.61,51.53 U2.29_8
  pour Top: -12.32,129.96 -12.31,129.93 -12.31,129.37 -11.67,129.28 -11.66,129.28 -11.66,129.28 -11.65,129.28 -11.64,129.28 -11.63,129.27 -11.63,129.27 -11.63,129.27 -11.62,129.26 -11.61,129.25 -11.61,129.25 -11.61,129.24 -11.6,129.23 -11.6,129.22 -11.6,129.22 -11.6,129.21 -11.6,129.2 -11.6,129.19 -11.6,129.19 -11.6,129.18 -11.61,129.17 -11.61,129.16 -11.62,129.16 -11.62,129.16 -11.63,129.15 -11.63,129.14 -11.64,129.14 -11.64,129.14 -11.65,129.13 -11.66,129.13 -11.67,129.13 -11.67,129.13 -11.68,129.13 -12.31,129.13 -12.31,-10.75 208.41,-10.75 208.41,130.1 -13.28,130.1 -13.28,129.99 -12.37,129.99 -12.34,129.98
  pour Bottom: -35.35,-32.85 232.24,-32.85 232.24,140.87 -33.57,140.87 -35.35,-21.97
GPIO8  (via drill 0.3)
  Top 0.004: v18.57,39.78 19.37,38.99 R1.1 | v18.57,40.73 18.57,43.27 19.05,43.75 19.05,44.23 U2.10
  Bottom 0.004: v18.57,40.73 v18.57,39.78
I2C_PW  (via drill 0.3)
  Top 0.004: 160.18,4.7 161.29,4.7 R1_PINH.2 | 158.75,3.43 158.91,3.43 C2.1 158.75,3.43 | 158.75,3.43 157.8,3.43 C1.1 | 160.18,4.7 160.02,4.7 158.75,3.43 | 160.18,4.7 R2-PINH.2 160.18,8.03 159.7,8.51 SENSOR2.6 159.54,8.67 159.54,9.3 158.43,10.41 | 158.12,10.09 158.12,8.67 SENSOR2.8 | 158.43,10.41 158.91,10.89 158.91,11.52 SENSOR2.2 | 158.43,10.41 158.12,10.09 | v21.75,60.58 21.75,61.69 U2.17 | v123.83,38.83 v101.44,61.21 | 158.12,10.09 v157.96,10.25
  Bottom 0.004: v21.75,60.58 22.38,61.21 v101.44,61.21 | v123.83,38.83 152.4,10.25 v157.96,10.25
INT_RTC  (via drill 0.3)
  Top 0.004: 82.08,43.91 81.6,44.38 81.6,48.51 82.23,49.15 82.23,56.13 U3.3 | 82.08,43.91 82.55,43.43 84.61,43.43 87.79,46.61 R1_PINH1.1 | v16.67,40.73 16.67,44.23 U2.8 | v16.67,36.76 16.67,30.26 19.21,27.72 INT_RTC.TP | v79.69,41.53 82.08,43.91
  Bottom 0.004: v16.67,36.76 v16.67,40.73 17.15,41.21 79.38,41.21 v79.69,41.53
IO/BOOT  (via drill 0.3)
  Top 0.004: C6.1 26.99,107.57 26.99,108.2 26.83,108.36 26.35,108.36 25.88,108.84 BOOT_BUTTON.3 25.72,108.84 22.54,105.66 22.38,105.66 | BOOT_BUTTON.4 22.23,109 21.11,107.88 21.11,107.57 R_BOOT.1 20.96,107.41 20.96,107.09 22.38,105.66 | v23.18,72.32 24.13,71.37 24.13,61.85 U2.15 | 22.38,105.66 v23.18,104.87
  Bottom 0.004: v23.18,104.87 v23.18,72.32
IO/CHANGE  (via drill 0.3)
  Top 0.004: C10.1 52.07,107.41 51.59,107.88 51.59,108.04 50.8,108.84 CHANGE_BUTTON.3 50.64,108.84 49.37,107.57 49.37,107.41 49.21,107.25 48.26,107.25 | 46.36,106.61 46.04,106.93 46.04,107.25 R_CHANGE.1 | 46.36,106.61 48.1,106.61 48.26,106.77 48.26,107.25 | 48.26,107.25 48.26,107.88 47.31,108.84 CHANGE_BUTTON.4 | v14.13,62.96 14.13,61.85 U2.23 | 46.36,106.61 v46.2,106.46
  Bottom 0.004: v14.13,62.96 23.02,71.85 23.34,71.85 46.2,94.71 v46.2,106.46
MISO  (via drill 0.3)
  Top 0.004: v88.9,30.89 91.92,33.91 92.39,33.91 R8.1 | v80.81,22.79 80.81,21.68 79.85,20.73 79.53,20.73 D12.1 79.38,20.73 78.11,22 78.11,24.22 v48.1,54.23 | v32.7,54.07 33.81,54.07 U1.2 | v14.61,55.81 10.48,59.94 10,59.94 9.05,60.89 | 9.05,60.89 8.89,61.05 8.89,61.69 U2.27 9.05,61.85 3.65,67.24 3.65,92.96 4.45,93.76 4.92,93.76 J4.P7 | 9.05,60.89 6.83,58.67 6.83,44.54 5.88,43.59 5.88,16.29 3.65,14.06 3.65,11.36 MISO.TP
  Bottom 0.004: v80.81,22.79 v88.9,30.89 | v14.61,55.81 30.96,55.81 v32.7,54.07 47.94,54.07 v48.1,54.23
MOSI  (via drill 0.3)
  Top 0.004: v12.7,40.73 15.24,43.27 15.24,44.23 U2.7 | v5.24,22.95 3.34,21.05 MOSI.TP | v16.04,62.96 16.04,65.02 3.97,77.09 3.97,88.36 4.92,89.31 J4.P3 | 44.77,30.73 40.48,35.02 40.48,44.7 41.59,45.81 41.59,51.37 U1.5 | v88.11,15.97 88.11,14.86 J1.14 | v55.09,16.92 45.09,26.92 R7.1 44.93,26.92 44.13,27.72 v44.13,29.14 | v44.77,29.78 44.77,30.73 | 44.77,30.73 D11.1
  Bottom 0.004: 12.38,40.42 5.24,33.27 v5.24,22.95 | 12.38,40.42 v12.7,40.73 12.23,41.21 11.91,41.21 11.91,58.83 v16.04,62.96 | v88.11,15.97 87.16,16.92 v55.09,16.92 | v44.77,29.78 v44.13,29.14 23.66,29.14 12.38,40.42
N$1  (via drill 0.3)
  Top 0.004: v157.48,50.58 152.56,45.65 R2-USB1.2 | v164.47,51.85 164.15,52.16 163.67,52.16 J2.A5
  Bottom 0.004: v157.48,50.58 163.2,50.58 v164.47,51.85
N$3
  Top 0.004: C_DELAY.1 53.98,100.9 52.23,102.65 IC1.5
N$5  (via drill 0.3)
  Top 0.004: v129.22,46.61 128.59,45.97 CHG_LED.C | v130.65,45.18 129.86,44.38 129.86,44.07 R1_BAT.1
  Bottom 0.004: v130.65,45.18 v129.22,46.61
N$6  (via drill 0.3)
  Top 0.004: v84.3,22.48 83.34,21.52 83.34,21.21 C4.1 | 90.81,28.35 92.23,29.78 D4.1 | 90.81,28.35 v88.9,26.45 | 90.81,28.35 86.2,32.95 85.73,32.95 D3.2
  Bottom 0.004: v84.3,22.48 88.27,26.45 v88.9,26.45
N$7
  Top 0.004: R1_BAT.2 128.75,43.91 130.97,41.69 132.56,41.69 134.78,43.91 MCP73831.1
N$8
  Top 0.004: R_CAPACITOR.1 84.3,58.67 85.89,60.26 D7.1
N$9
  Top 0.004: R2_BAT.2 131.92,42.64 131.92,43.91 132.08,44.07 MCP73831.5
N$10  (via drill 0.3)
  Top 0.004: v161.77,51.53 161.77,49.15 159.23,46.61 R2-USB.1 | v162.56,52.32 162.56,54.86 162.88,55.18 163.51,55.18 J2.B5
  Bottom 0.004: v162.56,52.32 v161.77,51.53
N$11
  Top 0.004: J1.24 83.03,14.86 83.03,15.81 81.28,17.56 81.28,18.67 82.08,19.46 EPD_C12.2
N$21  (via drill 0.3)
  Top 0.004: v91.76,16.6 93.03,15.33 93.03,14.86 J1.4 | v77.95,21.52 77.95,23.43 77.47,23.91 EPD_C1.2
  Bottom 0.004: v91.76,16.6 90.01,18.35 81.12,18.35 v77.95,21.52
N$22
  Top 0.004: J1.5 92.71,14.7 92.71,14.22 92.87,14.06 94.62,14.06 95.09,14.54 95.09,17.56 93.35,19.3 EPD_C2.2
N$23
  Top 0.004: J1.18 86.04,14.86 86.04,18.83 86.68,19.46 EPD_C6.2
N$24  (via drill 0.3)
  Top 0.004: v85.57,15.65 85.57,14.86 J1.19 | v88.27,17.08 88.74,17.56 89.06,17.56 89.54,18.03 89.54,18.67 90.17,19.3 EPD_C7.2
  Bottom 0.004: v85.57,15.65 85.73,15.49 88.27,15.49 88.58,15.81 88.58,16.76 v88.27,17.08
N$25  (via drill 0.3)
  Top 0.004: v86.36,20.25 85.89,19.78 85.89,17.87 85.09,17.08 85.09,14.86 J1.20 | v87.95,20.25 88.42,19.78 88.42,19.46 EPD_C8.2
  Bottom 0.004: v87.95,20.25 v86.36,20.25
N$27
  Top 0.004: J1.22 83.98,14.86 83.98,16.76 83.03,17.71 83.03,18.98 83.5,19.46 EPD_C10.2
PREVGH  (via drill 0.3)
  Top 0.004: v84.46,18.83 84.3,18.67 84.3,18.03 84.61,17.71 84.61,14.86 J1.21 | v90.97,18.67 91.6,19.3 EPD_C9.2 91.76,19.3 92.08,19.62 92.08,25.81 D5.1
  Bottom 0.004: v84.46,18.83 84.61,18.67 v90.97,18.67
PREVGL  (via drill 0.3)
  Top 0.004: J1.23 83.5,14.86 83.5,16.76 82.71,17.56 82.71,19.62 83.19,20.1 84.77,20.1 85.25,19.62 EPD_C11.2 85.09,19.62 v85.73,20.25 | v86.84,21.37 86.84,21.84 94.78,29.78 95.73,29.78 D4.2
  Bottom 0.004: v85.73,20.25 v86.84,21.37
RESE  (via drill 0.3)
  Top 0.004: v92.87,16.13 93.5,15.49 93.5,14.86 J1.3 | v76.84,18.03 76.36,18.51 75.88,18.51 R3.2 | v79.85,18.03 76.2,14.38 74.3,14.38 73.66,15.02 72.71,15.02 Q3.2
  Bottom 0.004: v92.87,16.13 90.49,16.13 88.58,18.03 v79.85,18.03 v76.84,18.03
RESE'  (via drill 0.3)
  Top 0.004: SJ1.2 71.92,10.57 71.76,10.73 71.76,12.48 R2.2 71.6,12.63 v73.34,14.38 | v74.45,16.13 74.93,16.13 75.72,16.92 75.72,17.08 R3.1
  Bottom 0.004: v74.45,16.13 73.34,15.02 v73.34,14.38
RESET  (via drill 0.3)
  Top 0.004: RESET_BUTTON.3 65.72,108.84 66.2,108.84 67.31,107.73 67.31,107.41 C5.1 67.31,107.25 65.88,105.82 62.23,105.82 60.64,107.41 R_RESET.1 60.8,107.57 62.07,108.84 RESET_BUTTON.4 62.07,109 61.75,109.31 57.31,109.31 50.8,102.8 50.33,102.8 | 50.33,102.8 49.53,102.8 IC1.1 | v10.32,58.04 10.32,44.38 U2.3 | 50.33,102.8 v50.33,102.65
  Bottom 0.004: v10.32,58.04 50.33,98.04 v50.33,102.65
RTC_RST  (via drill 0.3)
  Top 0.004: v23.02,60.58 23.02,61.69 U2.16 | v80.49,57.4 80.96,56.93 80.96,56.29 U3.4
  Bottom 0.004: v23.02,60.58 23.5,60.1 77.79,60.1 v80.49,57.4
RX
  Top 0.004: U2.24 12.7,61.85 12.7,66.45 RX.TP
SCK  (via drill 0.3)
  Top 0.004: v88.11,13.9 88.58,14.38 88.58,14.7 J1.13 | v62.07,13.9 49.21,26.76 R6.1 49.37,26.92 v50.17,27.72 | v12.07,40.73 14.13,42.8 14.13,44.23 U2.6 13.97,44.38 13.97,48.04 19.05,53.12 v19.05,59.47 | v5.24,33.91 5.24,28.03 2.86,25.65 SCK.TP | 51.28,28.99 50.64,28.99 49.05,30.57 D10.1 | 51.28,28.99 52.87,28.99 53.18,29.3 53.18,41.21 41.75,52.64 U1.6 41.75,52.8 42.55,53.59 42.55,55.34 28.73,69.15 | v6.19,91.53 5.08,91.53 J4.P5 | 28.73,69.15 v22.7,75.18 | 28.73,69.15 v28.58,68.99 | 51.28,28.99 v51.28,28.83
  Bottom 0.004: v62.07,13.9 v88.11,13.9 | v5.24,33.91 v12.07,40.73 | v6.19,91.53 22.54,75.18 v22.7,75.18 | v28.58,68.99 v19.05,59.47 | v51.28,28.83 v50.17,27.72
SCL  (via drill 0.3)
  Top 0.004: R2-PINH.1 160.18,3.59 160.66,4.06 161.77,4.06 162.09,4.38 162.09,9.78 160.34,11.52 SENSOR2.4 160.5,11.68 165.9,17.08 166.21,17.08 166.53,17.4 166.53,20.1 165.9,20.73 165.42,20.73 J3.4 165.26,20.73 152.24,33.75 152.24,38.51 143.35,47.4 | 143.35,47.4 143.19,47.56 142.88,47.56 U4.7 | v19.84,59.47 17.94,61.37 17.94,61.69 U2.20 | v82.87,53.43 83.5,52.8 83.5,48.67 84.77,47.4 84.77,46.92 U3.16 | v144.15,48.19 143.35,47.4
  Bottom 0.004: v19.84,59.47 76.84,59.47 v82.87,53.43 138.91,53.43 v144.15,48.19
SDA  (via drill 0.3)
  Top 0.004: 159.54,12.16 159.23,12.48 158.12,12.48 156.85,11.21 156.85,3.27 157.48,2.63 160.5,2.63 161.29,3.43 R1_PINH.1 | 159.54,12.16 159.54,11.68 SENSOR2.3 | v143.51,48.19 142.88,48.19 U4.8 | v143.51,44.54 143.51,41.05 164.78,19.78 165.26,19.78 J3.3 165.42,19.62 165.9,19.62 166.37,19.14 166.37,17.56 166.05,17.24 165.74,17.24 165.58,17.08 164.47,17.08 159.54,12.16 | v27.62,52.8 19.21,61.21 19.21,61.69 U2.19 | 82.87,48.04 v82.87,52.8 | 82.87,48.04 83.5,47.4 83.5,46.92 U3.15 | 82.87,48.04 v83.03,48.04
  Bottom 0.004: v143.51,44.54 143.51,48.04 | v82.87,52.8 v27.62,52.8 | v83.03,48.04 143.51,48.04 | 143.51,48.04 v143.51,48.19
SRC  (via drill 0.3)  (1 unrouted)
  Top 0.004: v85.73,21.21 84.77,21.21 C4.2 | v95.09,25.18 95.73,25.81 D5.2 | v76.52,21.84 72.07,17.4 Q3.3
  Bottom 0.004: v95.09,25.18 89.69,25.18 v85.73,21.21 84.93,22 76.68,22 v76.52,21.84
SS_SD  (via drill 0.3)
  Top 0.004: 9.21,98.68 10.16,98.68 10.8,99.31 11.91,99.31 12.7,98.52 D8.1 | 9.21,98.68 8.57,98.68 R10.1 | v9.05,60.26 12.7,56.61 12.7,49.78 11.59,48.67 11.59,44.38 U2.4 | v9.05,84.87 5.56,88.36 J4.P2 | v9.21,87.56 9.21,98.68
  Bottom 0.004: v9.05,60.26 v9.05,84.87 9.21,84.87 v9.21,87.56
TX
  Top 0.004: U2.25 11.43,61.85 11.43,65.5 10,66.93 TX.TP
USB_D+  (via drill 0.3)
  Top 0.004: v153.51,45.97 154.47,45.97 D1.1 | v25.08,44.07 24.45,44.07 24.29,44.23 U2.14
  Bottom 0.004: v153.51,45.97 151.61,44.07 v25.08,44.07
USB_D-  (via drill 0.3)
  Top 0.004: v153.51,44.07 154.47,44.07 D1.3 | v25.08,43.43 24.77,43.11 23.66,43.11 23.02,43.75 23.02,44.23 U2.13
  Bottom 0.004: v153.51,44.07 153.35,43.91 25.56,43.91 v25.08,43.43
VBAT
  Top 0.008: U4.2 140.81,47.56 140.81,47.24 U4.3 140.65,47.08 140.02,47.08 | 138.11,45.18 138.75,44.54 138.75,44.07 Q1.3 138.59,43.91 138.59,41.53 138.27,41.21 137.16,41.21 137,41.37 137,43.91 135.1,45.81 134.78,45.81 MCP73831.3 | 138.11,45.18 136.37,46.92 C2_BAT.1 | 138.11,45.18 140.02,47.08 | 140.02,47.08 140.02,48.35 151.29,59.62 VBAT.TP
VBUS  (via drill 0.3)
  Top 0.008: D1.5 156.85,45.02 156.53,45.02 156.05,44.54 v156.05,43.43 156.05,42.32 156.53,41.84 C5_USB.1 156.69,41.84 156.69,40.42 C4_USB.1 156.69,40.26 156.69,39.15 157.96,37.88 PFMF.050.1.2 | 132.08,45.97 130.18,45.97 CHG_LED.A 130.02,45.97 129.22,45.18 128.11,45.18 127.64,45.65 126.84,45.65 | 126.84,45.65 126.68,45.65 C1_BAT.1 126.84,45.65 | 137.64,43.43 137.64,44.23 135.26,46.61 132.72,46.61 132.08,45.97 | 137.64,43.43 137.64,42 Q1.1 | 132.08,45.97 MCP73831.4 | 126.84,45.65 126.84,38.99 D2.2 126.68,38.99 126.21,38.51 124.94,38.51 R1_PWRUSB.2 124.78,38.35 120.65,38.35 87,72.01 87,87.56 VBUS.TP | 137.64,43.43 v137.8,43.43
  Bottom 0.008: v137.8,43.43 v156.05,43.43
VRTC
  Top 0.008: C8.1 82.71,44.38 82.71,46.29 82.23,46.77 U3.14 82.39,46.92 82.39,54.7 83.03,55.34 83.03,60.74 83.34,61.05 86.52,61.05 86.68,60.89 86.68,58.51 | 86.68,58.51 87,58.51 90.81,54.7 90.81,49.15 C10_SUPERCAP.1 | 86.68,58.51 85.57,58.51 R_CAPACITOR.2
VUSB
  Top 0.008: J2.A4 163.51,50.89 163.51,51.05 J2.B9 163.51,51.21 162.88,51.21 162.09,52 | 163.51,55.66 163.51,55.81 J2.A9 | 162.09,52 162.09,54.86 162.88,55.66 163.51,55.66 | 163.51,55.66 J2.B4 | 162.09,52 161.61,52 155.58,45.97 155.58,43.11 153.35,40.89 153.35,37.88 PFMF.050.1.1
(copper drawn outside any net)
  shapes: Top area x8